# EAGLE board parport (EAGLE 7.7.0)
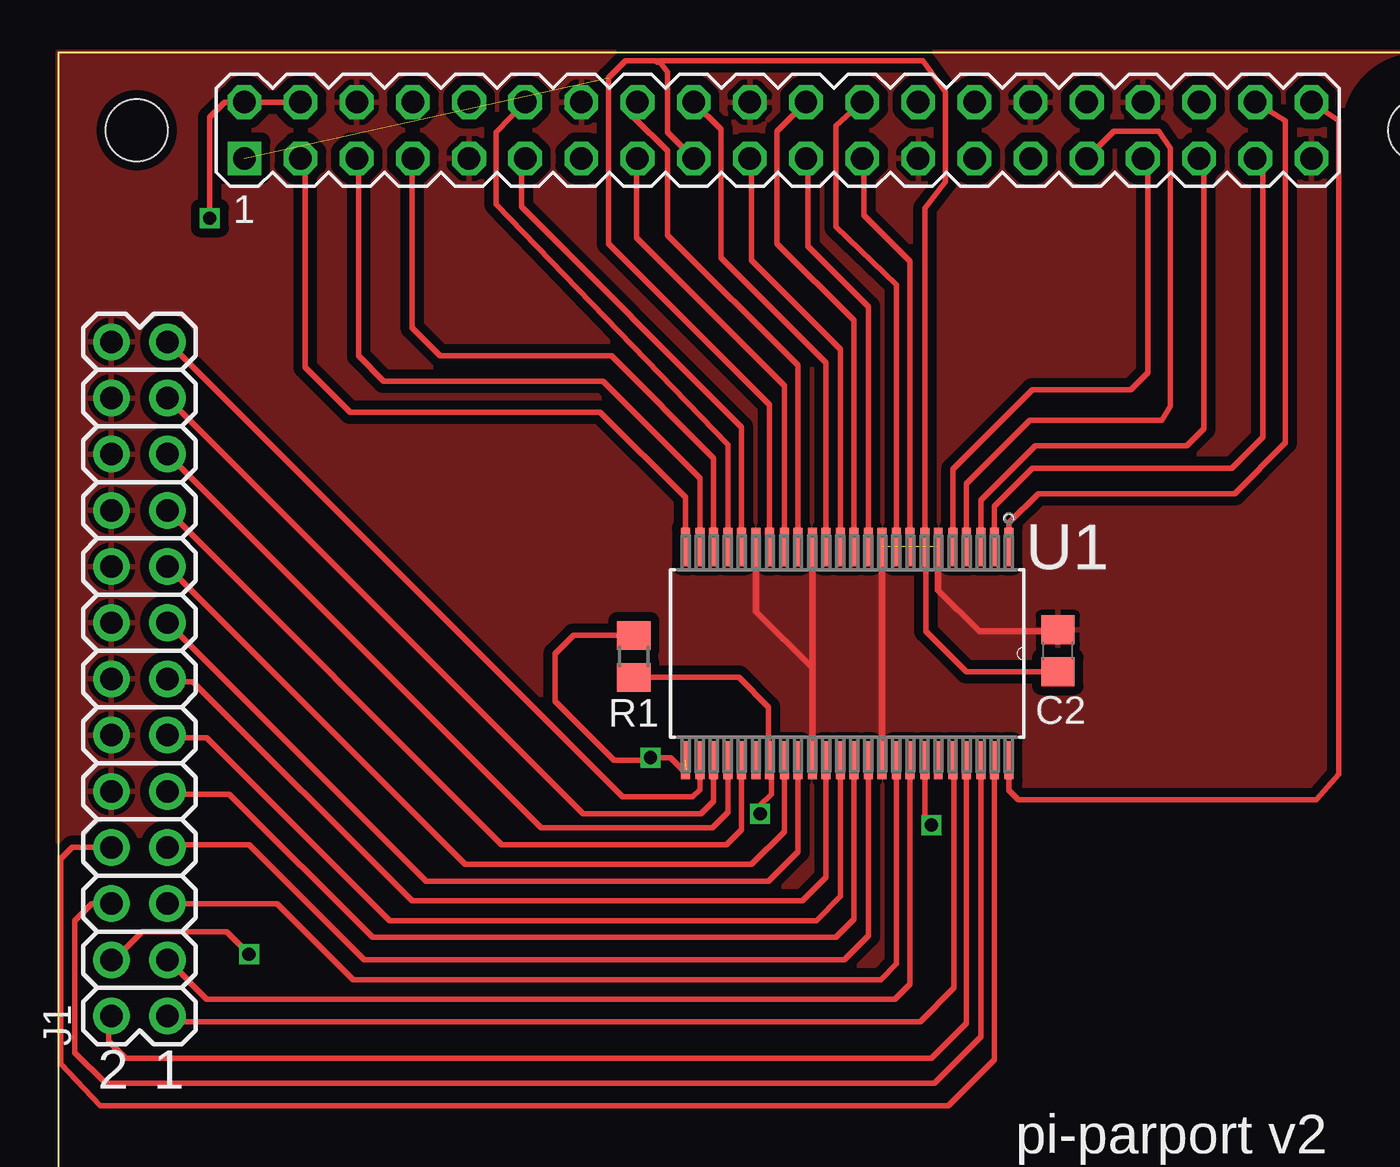
[diagram p0: board, top side]
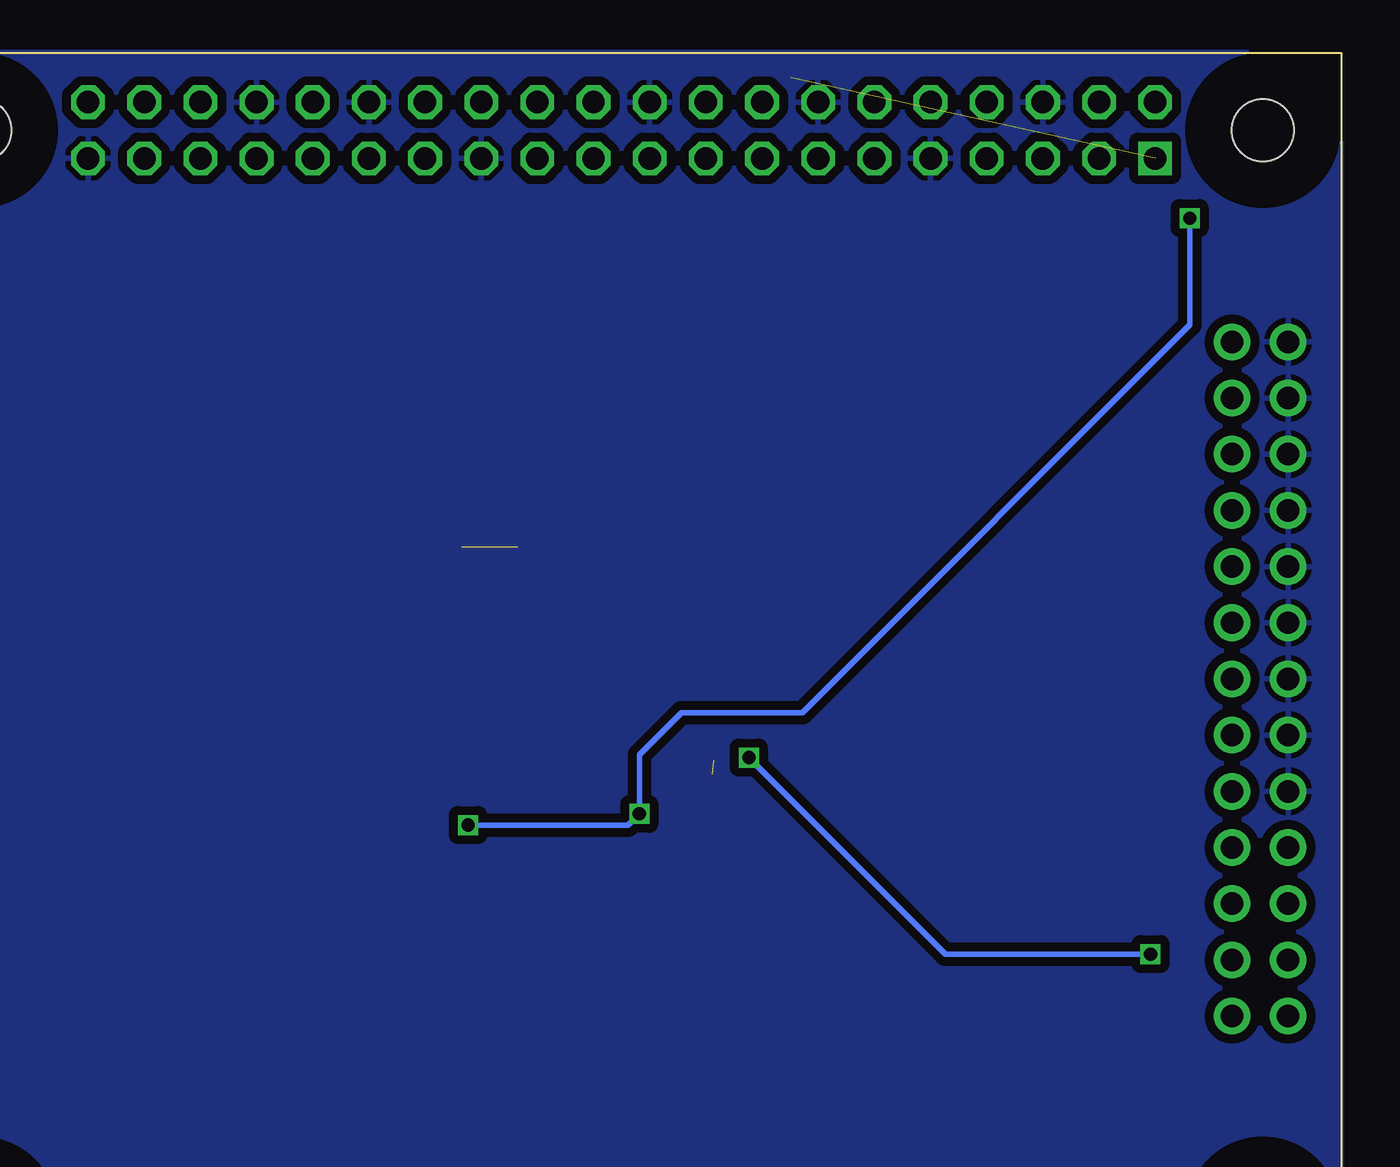
[diagram p1: board, bottom side, seen from below]

No outline drawn. Coordinates in mm, seen from the top.
Copper layers (1*16): Top 0.035mm / dielectric 1.5mm / Bottom 0.035mm
Design rules "ITEADstudio_DRC": minimum track width 6mil, minimum drill 12mil, track to track 6mil, track to pad 6mil, pad to pad 6mil, via to via 6mil, smd to smd 0mil, copper to edge 10mil, drill to drill 10mil, minimum pad ring 10mil, minimum via ring 6mil, stop-mask expansion 2mil, vias tented up to drill 100mil, thermal gap 10mil
Holes 2.8 mm at 49.4,7.3 49.4,56.3 107.4,56.3 107.4,7.3
tRestrict: area 105.9,54.8 to 109,57.8; area 105.9,5.8 to 109,8.8
bRestrict: area 47.9,54.8 to 50.9,57.8; area 105.9,5.8 to 109,8.8; area 105.9,54.8 to 109,57.8; area 47.9,5.8 to 50.9,8.8
Milling: 4 lines

## Footprints (pad centres in the part's own frame; a part is rotated, then mirrored left to right if it is on the bottom)
C0805 = smd 1.3 x 1.5: 1 -0.95,0; 2 0.95,0
2X13 = drill 1.016 pad 1.651: 1 0,0; 2 0,2.54; 3 2.54,0; 4 2.54,2.54; 5 5.08,0; 6 5.08,2.54; 7 7.62,0; 8 7.62,2.54; 9 10.16,0; 10 10.16,2.54; 11 12.7,0; 12 12.7,2.54; 13 15.24,0; 14 15.24,2.54; 15 17.78,0; 16 17.78,2.54; 17 20.32,0; 18 20.32,2.54; 19 22.86,0; 20 22.86,2.54; 21 25.4,0; 22 25.4,2.54; 23 27.94,0; 24 27.94,2.54; 25 30.48,0; 26 30.48,2.54
PIN_20X2 = drill 1.016 square: 1 -24.13,-1.27 | drill 1.016 octagon: 2 -24.13,1.27; 3 -21.59,-1.27; 4 -21.59,1.27; 5 -19.05,-1.27; 6 -19.05,1.27; 7 -16.51,-1.27; 8 -16.51,1.27; 9 -13.97,-1.27; 10 -13.97,1.27; 11 -11.43,-1.27; 12 -11.43,1.27; 13 -8.89,-1.27; 14 -8.89,1.27; 15 -6.35,-1.27; 16 -6.35,1.27; 17 -3.81,-1.27; 18 -3.81,1.27; 19 -1.27,-1.27; 20 -1.27,1.27; 21 1.27,-1.27; 22 1.27,1.27; 23 3.81,-1.27; 24 3.81,1.27; 25 6.35,-1.27; 26 6.35,1.27; 27 8.89,-1.27; 28 8.89,1.27; 29 11.43,-1.27; 30 11.43,1.27; 31 13.97,-1.27; 32 13.97,1.27; 33 16.51,-1.27; 34 16.51,1.27; 35 19.05,-1.27; 36 19.05,1.27; 37 21.59,-1.27; 38 21.59,1.27; 39 24.13,-1.27; 40 24.13,1.27
R0805 = smd 1.3 x 1.5: 1 -0.95,0; 2 0.95,0
SOP63P1035X279-48N = smd 1.727 x 0.406: 1 -4.826,7.315; 2 -4.826,6.655; 3 -4.826,6.045; 4 -4.826,5.385; 5 -4.826,4.775; 6 -4.826,4.115; 7 -4.826,3.505; 8 -4.826,2.845; 9 -4.826,2.235; 10 -4.826,1.575; 11 -4.826,0.965; 12 -4.826,0.305; 13 -4.826,-0.305; 14 -4.826,-0.965; 15 -4.826,-1.575; 16 -4.826,-2.235; 17 -4.826,-2.845; 18 -4.826,-3.505; 19 -4.826,-4.115; 20 -4.826,-4.775; 21 -4.826,-5.385; 22 -4.826,-6.045; 23 -4.826,-6.655; 24 -4.826,-7.315; 25 4.826,-7.315; 26 4.826,-6.655; 27 4.826,-6.045; 28 4.826,-5.385; 29 4.826,-4.775; 30 4.826,-4.115; 31 4.826,-3.505; 32 4.826,-2.845; 33 4.826,-2.235; 34 4.826,-1.575; 35 4.826,-0.965; 36 4.826,-0.305; 37 4.826,0.305; 38 4.826,0.965; 39 4.826,1.575; 40 4.826,2.235; 41 4.826,2.845; 42 4.826,3.505; 43 4.826,4.115; 44 4.826,4.775; 45 4.826,5.385; 46 4.826,6.045; 47 4.826,6.655; 48 4.826,7.315

## Placement (x,y rotation side)
C2  100nF  [C0805]  91.06,32.77 90 top
J1  [2X13]  50.8,16.26 90 top
K1  PIN20X2  [PIN_20X2]  78.4,56.3 0 top
R1  1.4K  [R0805]  71.88,32.51 270 top
U1  SN74LVC161284DL  [SOP63P1035X279-48N]  81.53,32.64 270 top

## Library data of the parts
C2 R1 = resistor
J1 = SparkFun-Connectors
K1 = FLYFISH
U1 = worlickwerx; MPN: SN74LVC161284DL; PACKAGE: 48-SSOP; SUPPLIER: Texas Instruments

## Nets
+3V3: C2.1 K1.1 K1.17 U1.7 U1.18
+5V: K1.2 K1.4 R1.2 U1.31 U1.42
CONTROL0: J1.1 U1.44
CONTROL1: J1.2 U1.45
CONTROL2: J1.6 U1.46
CONTROL3: J1.8 U1.47
DATA0: J1.3 U1.41
DATA1: J1.5 U1.40
DATA2: J1.7 U1.38
DATA3: J1.9 U1.37
DATA4: J1.11 U1.36
DATA5: J1.13 U1.35
DATA6: J1.15 U1.33
DATA7: J1.17 U1.32
GND: C2.2 J1.10 J1.12 J1.14 J1.16 J1.18 J1.20 J1.22 J1.24 J1.26 K1.6 K1.9 K1.14 K1.20 K1.25 K1.30 K1.34 K1.39 U1.6 U1.10 U1.15 U1.19 U1.34 U1.39
GPIO2: K1.3 U1.24
GPIO3: K1.5 U1.23
GPIO4: K1.7 U1.22
GPIO5: K1.29
GPIO6: K1.31 U1.4
GPIO7: K1.26
GPIO8: K1.24 U1.9
GPIO9: K1.21 U1.11
GPIO10: K1.19 U1.13
GPIO11: K1.23 U1.8
GPIO12: K1.32
GPIO13: K1.33 U1.5
GPIO16: K1.36
GPIO17: K1.11 U1.20
GPIO18: K1.12 U1.21
GPIO19: K1.35 U1.3
GPIO20: K1.38 U1.1
GPIO21: K1.40 U1.48
GPIO22: K1.15 U1.17
GPIO23: K1.16 U1.16
GPIO24: K1.18 U1.14
GPIO25: K1.22 U1.12
GPIO26: K1.37 U1.2
ID_SC: K1.28
ID_SD: K1.27
RXD0: K1.10
STATUS3: J1.4 R1.1 U1.25
STATUS4: J1.25 U1.26
STATUS5: J1.23 U1.27
STATUS6: J1.19 U1.29
STATUS7: J1.21 U1.28
TXD0: K1.8

## Tracks (layer width: path | path; a pad name or v marks a point on that pad's centre or on a via)
+3V3  (1 unrouted)
  Top 0.254: U1.18 78.03,43.89 70.74,51.18 70.74,58.67 71.5,59.44 72.9,59.44 72.96,59.37 73.03,59.44 | 73.03,59.44 73.41,58.93 73.41,56.21 K1.17 | 73.03,59.44 84.96,59.44 85.98,58.04 85.98,53.98 85.04,52.78 U1.7 85.09,37.41 85.09,33.66 86.93,31.82 C2.1
+5V  (via drill 0.6)
  Top 0.254: U1.42 85.04,25.2 v85.34,24.89 | v77.6,25.4 77.6,25.78 78.11,26.29 78.11,27.74 U1.31 77.98,27.86 77.98,30.23 76.64,31.56 R1.2 | K1.4 K1.2 53.38,57.57 52.7,56.9 v52.7,52.32
  Bottom 0.254: v85.34,24.89 78.11,24.89 v77.6,25.4 77.6,28.07 75.69,29.97 70.23,29.97 52.7,47.5 v52.7,52.32
CONTROL0
  Top 0.254: U1.44 86.31,27.36 86.36,27.3 86.36,17.53 84.84,16 51.05,16 J1.1
CONTROL1
  Top 0.254: U1.45 86.92,15.93 85.34,14.35 48.9,14.35 48.13,15.11 48.13,16.13 J1.2
CONTROL2
  Top 0.254: U1.46 87.58,15.32 85.47,13.21 48.01,13.21 46.61,14.61 46.61,20.57 47.37,21.34 J1.6
CONTROL3
  Top 0.254: U1.47 88.19,14.28 86.11,12.19 47.75,12.19 45.97,14.1 45.97,23.37 46.48,23.88 J1.8
DATA0
  Top 0.254: U1.41 84.38,17.7 83.69,17.02 52.58,17.02 J1.3
DATA1
  Top 0.254: U1.40 83.77,18.62 83.06,17.91 59.18,17.91 55.75,21.34 J1.5
DATA2
  Top 0.254: U1.38 82.5,19.89 81.41,18.8 59.69,18.8 54.48,24 50.93,24 J1.7
DATA3
  Top 0.254: U1.37 81.84,20.62 81.03,19.81 60.07,19.81 53.59,26.29 50.93,26.29 J1.9
DATA4
  Top 0.254: U1.36 81.23,21.67 80.14,20.57 60.83,20.57 52.58,28.83 50.93,28.83 J1.11
DATA5
  Top 0.254: U1.35 80.57,22.53 79.5,21.46 61.85,21.46 51.94,31.37 50.93,31.37 J1.13
DATA6
  Top 0.254: U1.33 79.3,23.67 77.98,22.35 62.48,22.35 J1.15
DATA7
  Top 0.254: U1.32 78.69,24.59 77.22,23.11 64.26,23.11 J1.17
GND  (1 unrouted)
  Top 0.305: U1.10 U1.39 | U1.15 79.96,32 | 79.96,32 U1.34 | U1.6 85.65,35.51 87.5,33.66 91,33.66 C2.2 | U1.19 77.42,34.54 79.96,32
  pour Top (isolate 0.406): 45.85,59.82 110.87,59.82 110.87,3.68 45.85,3.68
  pour Bottom (isolate 0.406): 45.85,59.82 111,59.82 111,3.68 45.85,3.68
GPIO2
  Top 0.254: U1.24 74.22,39.7 70.36,43.56 59.05,43.56 57.02,45.59 57.02,54.82 K1.3
GPIO3
  Top 0.254: U1.23 74.88,40.56 70.48,44.96 60.58,44.96 59.44,46.1 59.44,54.94 K1.5
GPIO4
  Top 0.254: U1.22 75.49,41.48 70.87,46.1 63.12,46.1 61.85,47.37 61.85,54.99 K1.7
GPIO6
  Top 0.254: U1.4 86.92,40.31 89.79,43.18 95.76,43.18 96.14,43.81 96.14,55.5 95.63,56.26 93.6,56.26 K1.31
GPIO8
  Top 0.254: U1.9 83.77,49.33 81.03,51.94 81.03,56.51 K1.24
GPIO9
  Top 0.254: U1.11 82.5,48.31 79.76,51.05 79.76,54.94 K1.21
GPIO10
  Top 0.254: U1.13 81.23,46.41 77.22,50.42 77.22,54.94 K1.19
GPIO11
  Top 0.254: U1.8 84.38,50.37 82.3,52.45 82.3,54.94 K1.23
GPIO13
  Top 0.254: U1.5 86.31,40.97 89.92,44.58 94.36,44.58 95.12,45.34 95.12,54.82 K1.33
GPIO17
  Top 0.254: U1.20 76.76,42.88 66.8,52.83 66.8,54.86 K1.11
GPIO18
  Top 0.254: U1.21 76.15,42.09 65.66,52.96 65.66,56.21 K1.12
GPIO19
  Top 0.254: U1.3 87.58,39.57 90.04,42.04 96.9,42.04 97.66,42.8 97.66,54.82 K1.35
GPIO20
  Top 0.254: U1.1 88.85,38.56 90.17,39.88 99.06,39.88 101.35,42.16 101.35,56.72 K1.38
GPIO21
  Top 0.254: U1.48 88.85,26.47 89.28,26.04 102.74,26.04 103.76,27.18 103.76,56.72 K1.40
GPIO22
  Top 0.254: U1.17 78.69,44.76 72.01,51.44 72.01,54.99 K1.15
GPIO23
  Top 0.254: U1.16 79.3,45.67 73.41,51.56 73.41,55.37 71.88,56.9 71.88,57.4 K1.16
GPIO24
  Top 0.254: U1.14 80.57,45.8 75.82,50.55 75.82,56.34 K1.18
GPIO25
  Top 0.254: U1.12 81.84,47.7 78.36,51.18 78.36,56.26 K1.22
GPIO26
  Top 0.254: U1.2 88.19,39.29 89.92,41.02 98.93,41.02 100.33,42.42 100.33,54.69 K1.37
STATUS3  (via drill 0.6)  (1 unrouted)
  Top 0.254: J1.4 48.39,18.8 49.66,20.07 53.47,20.07 v54.48,19.05 | 74.3,27.18 73.53,27.94 v72.64,27.94 72.52,27.81 70.99,27.81 68.33,30.48 68.33,32.64 69.15,33.46 R1.1
  Bottom 0.254: v54.48,19.05 63.75,19.05 v72.64,27.94
STATUS4
  Top 0.254: U1.26 74.88,26.49 74.55,26.16 71.37,26.16 J1.25
STATUS5
  Top 0.254: U1.27 75.49,25.96 74.93,25.4 69.6,25.4 J1.23
STATUS6
  Top 0.254: U1.29 76.76,24.69 76.07,24 65.91,24 J1.19
STATUS7
  Top 0.254: U1.28 76.15,25.48 75.44,24.77 67.69,24.77 J1.21

## Text on the board
tNames: 2 | 1 | pi-parport v2 | (C) 2017 WorlickWerx